# Altium PCB IO_Board.PcbDoc
Units mil, origin at the board's own origin, x right, y up, seen from the top; angles counter-clockwise.
Board outline 2204.72 x 1604.33 mil, 2 copper layers (Top Layer, Bottom Layer); 63 components, 43 nets, 210 pads, 287 vias.
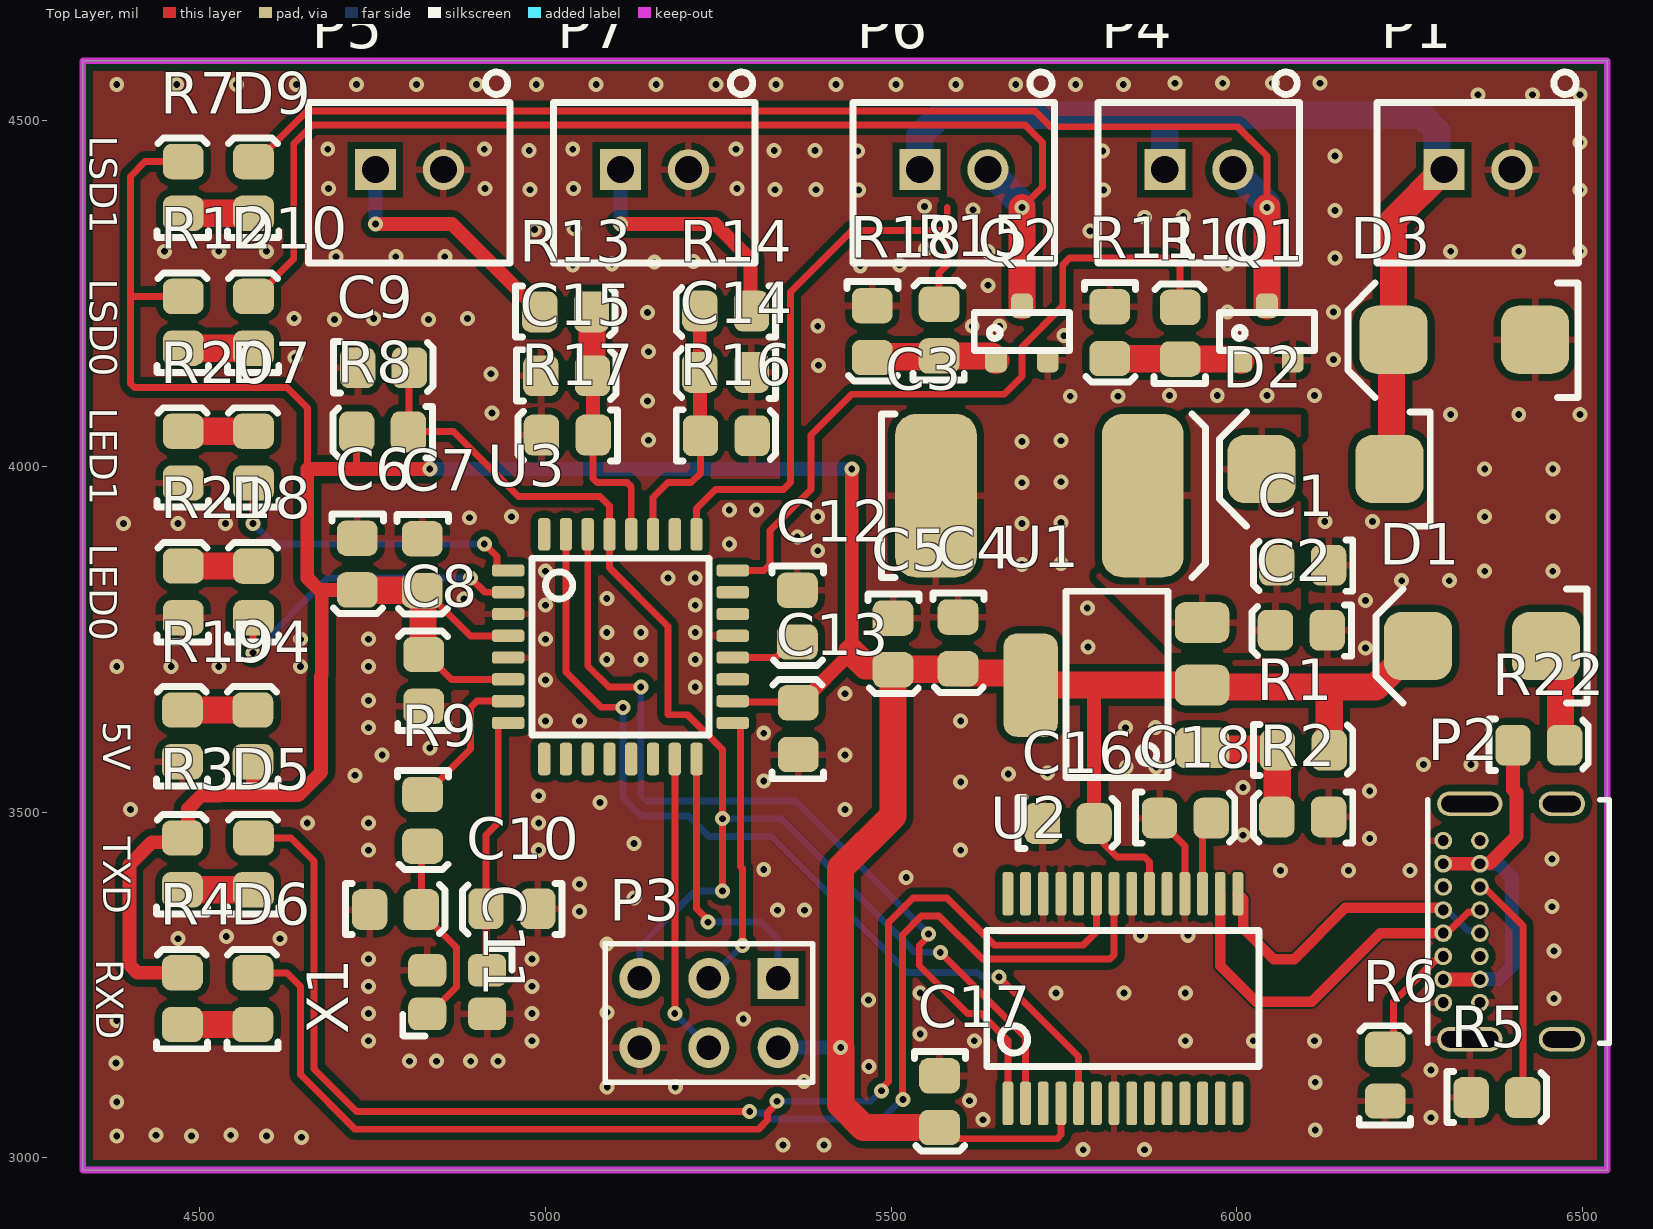
[diagram p0: Top Layer view]
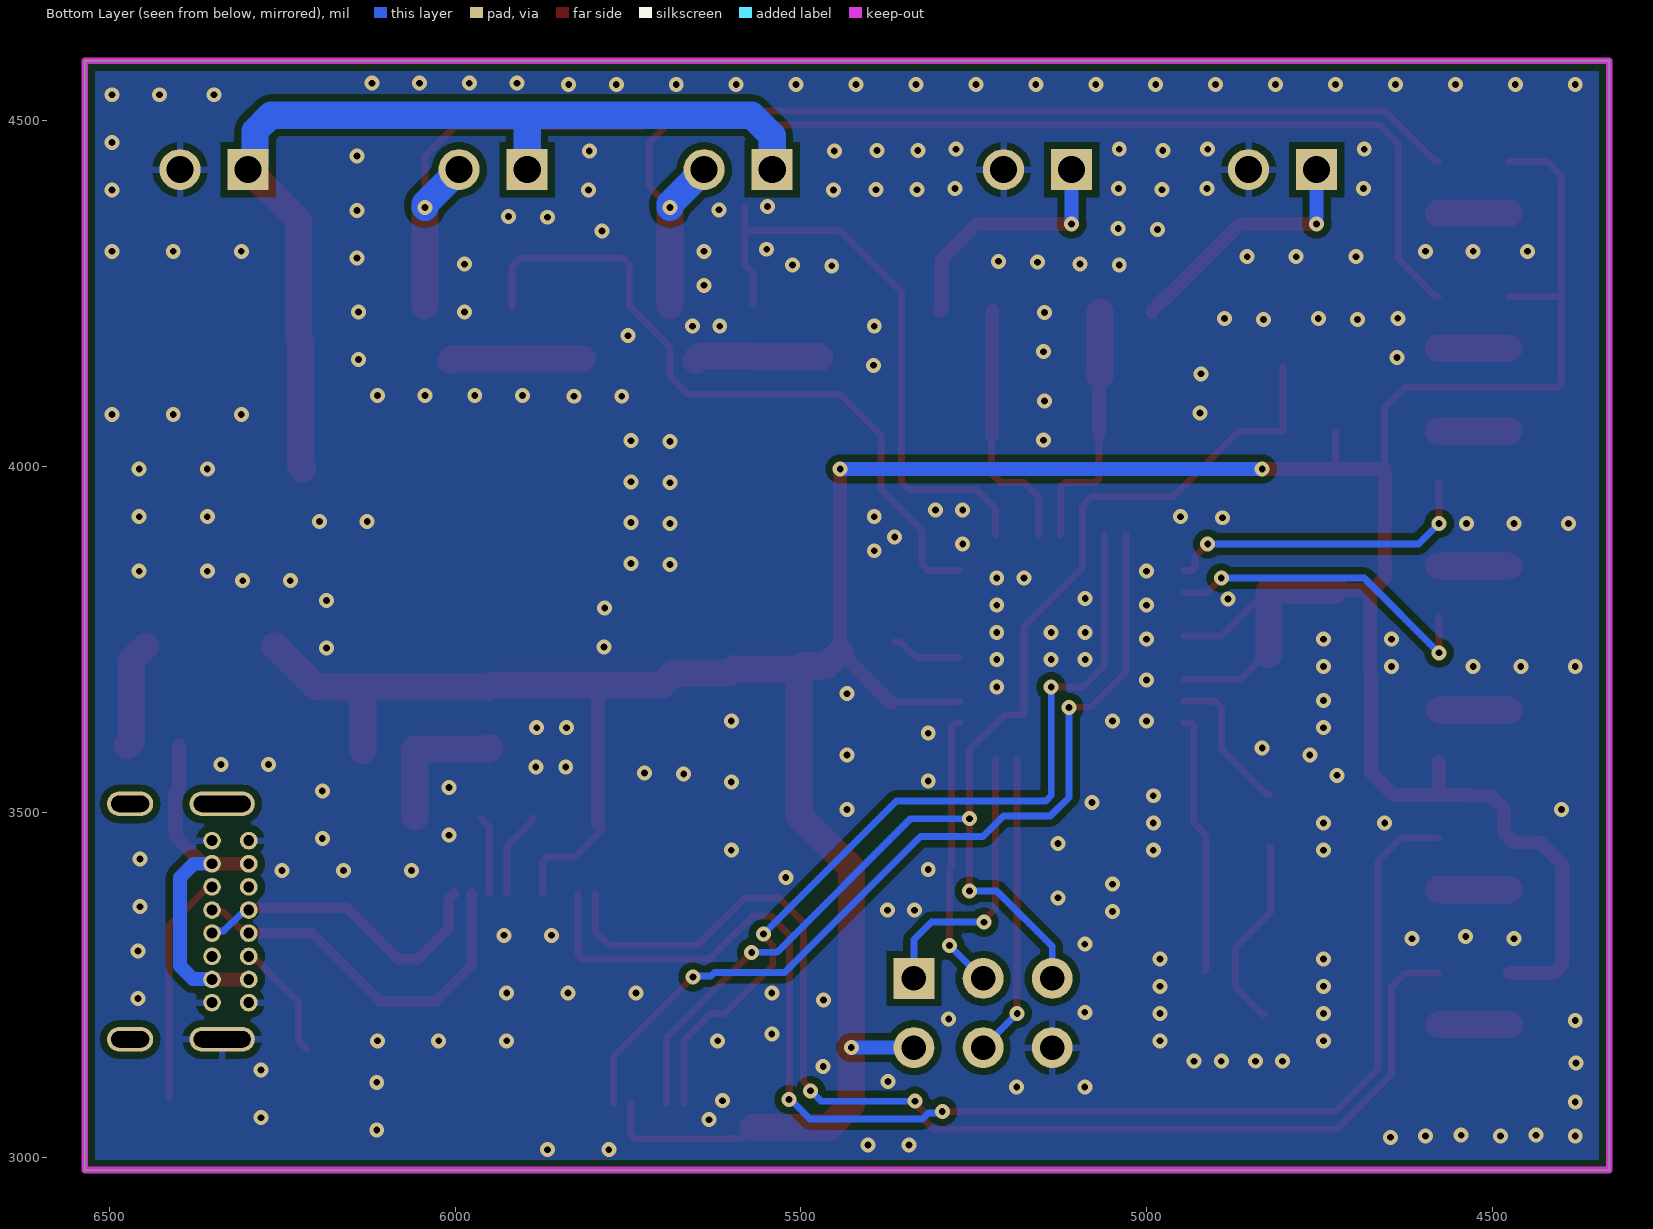
[diagram p1: Bottom Layer view, seen from below]

## Layer stack, top to bottom
Top Solder: solder mask 0.4, Solder Resist, Dk 3.5
Top Layer: signal copper 1.4
Dielectric 1: dielectric 12.6, FR-4, Dk 4.8
Bottom Layer: signal copper 1.4
Bottom Solder: solder mask 0.4, Solder Resist, Dk 3.5

## Board outline
4330.71,2982.28 4330.71,4586.61 6535.43,4586.61 6535.43,2982.28

## Design rules (kind name [scope] priority, off if disabled: settings)
Clearance Clearance_1 [InNet('GND') vs InDifferentialPairClass('USB_DIFF_CLASS')] p1: gap=2.4 ignorepadtopadclearanceinfootprint=TRUE
Clearance [All] p2: gap=10 ignorepadtopadclearanceinfootprint=TRUE except(0: Arc-Hole Track-Hole SMDPad-Hole THPad-Hole Via-Hole Fill-Hole Poly-Hole Region-Hole Text-Hole)
DiffPairsRouting DiffPairsUSB [InDifferentialPairClass('USB_DIFF_CLASS')] p1: maxlimit=52 minlimit=20 mostfreqgap=46.65 toplayer_minwidth=10 toplayer_maxwidth=100 toplayer_prefwidth=53.78 bottomlayer_minwidth=10 bottomlayer_maxwidth=100 bottomlayer_prefwidth=53.78 maxuncoupledlength=500
DiffPairsRouting [All] p2: maxlimit=10 minlimit=10 mostfreqgap=10 toplayer_minwidth=15 toplayer_maxwidth=15 toplayer_prefwidth=15 bottomlayer_minwidth=15 bottomlayer_maxwidth=15 bottomlayer_prefwidth=15 maxuncoupledlength=500
PolygonConnect [All] p1: thpad.connectstyle=Relief thpad.reliefconductorwidth=10 thpad.reliefentries=4 thpad.polygonreliefangle="90 Angle" thpad.airgapwidth=10 smdpad.connectstyle=Relief smdpad.reliefconductorwidth=10 smdpad.reliefentries=4 smdpad.polygonreliefangle="90 Angle" smdpad.airgapwidth=10 via.connectstyle=Direct via.reliefconductorwidth=10 via.reliefentries=4 via.polygonreliefangle="90 Angle" via.airgapwidth=10
RoutingVias [All] p1: holewidth=9.84 width=21.65 viastyle="Through Hole" minholewidth=9.84 minwidth=21.65 maxholewidth=9.84 maxwidth=21.65
SolderMaskExpansion [All] p1: expansion=4 istentingtop=FALSE
Width [All] p1: maxlimit=196.85 minlimit=2 preferedwidth=10 minimp=50.000000 maximp=50.000000 favimp=50.000000
29 further rules are at their usual default settings.

## Classes and differential pairs
differential pair class USB_DIFF_CLASS: USB
differential pair USB: +USB_P -USB_N

## Components (designator, comment, footprint, x,y, rotation, side; value= is the part's Value field where it differs from the comment)
C1 "470nF" 0805 6094.55,3855.97 r180 top
C2 "100nF" 0805 6092.52,3761.99 r180 top
C3 "68uF" 2924 5712.27,3957.55 r0 top
C4 "1uF" 0805 5597.64,3744.15 r270 top
C5 "100nF" 0805 5503.65,3742.66 r270 top
C6 "1uF" 0805 4728.85,3858.27 r270 top
C7 "100nF" 0805 4822.83,3857.3 r270 top
C8 "100nF" 0805 4822.83,3690.94 r90 top
C9 "10nF" 0805 4766.22,4143.7 r0 top
C10 "12pF" 0805 4950.79,3359.26 r180 top
C11 "12pF" 0805 4783.46,3360.09 r0 top
C12 "100nF" 0805 5365.2,3782.95 r270 top
C13 "100nF" 0805 5364.38,3621.08 r90 top
C14 "10nF" 0805 5260.04,4134.79 r180 top
C15 "10nF" 0805 5031.03,4132.1 r0 top
C16 "100nF" 0805 5756.38,3484.58 r0 top
C17 "100nF" 0805 5570.87,3080.71 r270 top
C18 "100nF" 0805 5925.88,3492.33 r0 top
D1 "SD560BTR" "SMB Diode" 6437.01,3740.16 r180 top
D2 "SD560BTR" "SMB Diode" 6210.63,3996.06 r180 top
D3 "SM6T39CAY" "ST SMB Diode" 6328.74,4183.07 r0 top
D4 "Red" "0805 LED" 4575.74,3610.71 r90 top
D5 "Orange" "0805 LED" 4576.77,3425.59 r90 top
D6 "Orange" "0805 LED" 4575.74,3230.62 r90 top
D7 "Blue" "0805 LED" 4576.77,4013.85 r90 top
D8 "Blue" "0805 LED" 4576.78,3818.88 r90 top
D9 "Yellow" "0805 LED" 4576.77,4403.77 r90 top
D10 "Yellow" "0805 LED" 4576.78,4208.81 r90 top
P1 "B2B-XH-A(LF)(SN)" "XH 2 PIN VERT" 6348.43,4424.13 r0 top
P2 "USB4085-GF-A" USB4085-GF-A 6456.69,3336.61 r90 top
P3 "2.54mm" "TH 2.54mm Header 2x3" 5336.22,3259.45 r180 top
P4 "B2B-XH-A(LF)(SN)" "XH 2 PIN VERT" 5944.88,4424.13 r0 top
P5 "B2B-XH-A(LF)(SN)" "XH 2 PIN VERT" 4803.15,4424.13 r0 top
P6 "B2B-XH-A(LF)(SN)" "XH 2 PIN VERT" 5590.55,4424.13 r0 top
P7 "B2B-XH-A(LF)(SN)" "XH 2 PIN VERT" 5157.48,4424.13 r0 top
Q1 "BC817-16LT1" "ON SOT-23 BJT" 6043.31,4192.91 r0 top
Q2 "BC817-16LT1" "ON SOT-23 BJT" 5688.98,4192.91 r0 top
R1 "240R" 0805 6096.46,3590.37 r0 top
R2 "680R" 0805 6094.55,3491.95 r180 top
R3 "2k" 0805 4473.91,3425.59 r90 top
R4 "2k" 0805 4473.91,3230.63 r90 top
R5 "5.1k" 0805 6376.46,3088.26 r0 top
R6 "5.1k" 0805 6213.34,3120.08 r90 top
R7 "2k" 0805 4474.94,4403.78 r90 top
R8 "1k" 0805 4763.78,4048.89 r180 top
R9 "0R" 0805 4823.28,3487.6 r270 top
R10 "1k" 0805 5916.82,4192.95 r90 top
R11 "20k" 0805 5816.93,4192.91 r270 top
R12 "2k" 0805 4474.94,4208.82 r90 top
R13 "51k" 0805 5029.53,4224.3 r0 top
R14 "51k" 0805 5260.04,4223.47 r180 top
R15 "1k" 0805 5568.19,4197.6 r90 top
R16 "51k" 0805 5261.95,4045.28 r0 top
R17 "51k" 0805 5031.03,4044.24 r180 top
R18 "20k" 0805 5473.47,4194.41 r270 top
R19 "2k" 0805 4473.91,3610.71 r90 top
R20 "1k" 0805 4474.94,4013.86 r90 top
R21 "1k" 0805 4474.94,3818.9 r90 top
R22 "0R" 0805 6437.01,3597.77 r0 top
U1 "TI LM317DCYR" "TI SOT-223" 5949.5,3593.05 r90 top
U2 "FT232RL" "FTDI 28-SSOP" 5834.97,3230.31 r0 top
U3 "ATMEGA 328P-AU" "ATMEL TQFP-32" 5108.27,3739.19 r0 top
X1 "16MHz" "Abracon 4-SMD 3.2x2.5" 4872.26,3239.69 r180 top

## Footprints (in the part's own frame and the unit in brackets; to place one, negate y for a bottom-side part, rotate by r counter-clockwise, add the part's x,y. Pads: shape width x height; smd on the part's side, far side on the other; paste and mask are expansions set on the pad)
0805 [mil]
  rrect50% 51.18x59.06 smd: 1(-37.87,-1.03) 2(36.93,-1.03)
  silkscreen extent -73,-37 71,37, body extent -39,-26 39,26, height 29
"0805 LED" [mil]
  rrect50% 51.18x59.06 smd: A(-37.87,-1.03) K(36.93,-1.03)
  silkscreen extent -73,-37 71,37, body extent -43,-25 35,25, height 39
2924 [mm]
  rrect50% 3x6 smd: 1(-3.75,0) 2(3.85,0)
  silkscreen extent -5.75,-3 6.15,3, body extent -3.94,-2.81 4.04,2.81, height 1.14
"Abracon 4-SMD 3.2x2.5" [mm]
  rrect50% 1.4x1.2 smd: 1(-1.1,-0.8) 2(1.1,0.8) GND(-1.1,0.8) GND(1.1,-0.8)
  silkscreen extent -2.02,-1.6 2,1.61, body extent -1.6,-1.25 1.6,1.25, height 0.8
"ATMEL TQFP-32" [mm]
  rrect50% 1.2x0.45 smd: 1(-4.125,2.8) 2(-4.125,2) 3(-4.125,1.2) 4(-4.125,0.4) 5(-4.125,-0.4) 6(-4.125,-1.2) 7(-4.125,-2) 8(-4.125,-2.8) 17(4.125,-2.8) 18(4.125,-2) 19(4.125,-1.2) 20(4.125,-0.4) 21(4.125,0.4) 22(4.125,1.2) 23(4.125,2) 24(4.125,2.8)
  rrect50% 0.45x1.2 smd: 9(-2.8,-4.125) 10(-2,-4.125) 11(-1.2,-4.125) 12(-0.4,-4.125) 13(0.4,-4.125) 14(1.2,-4.125) 15(2,-4.125) 16(2.8,-4.125) 25(2.8,4.125) 26(2,4.125) 27(1.2,4.125) 28(0.4,4.125) 29(-0.4,4.125) 30(-1.2,4.125) 31(-2,4.125) 32(-2.8,4.125)
  silkscreen extent -3.25,-3.25 3.25,3.25, body extent -4.5,-4.5 4.5,4.5, height 1.1
"FTDI 28-SSOP" [mm]
  rrect50% 0.4x1.6 smd paste+0 mask+0.051: 1(-4.225,-3.85) 2(-3.575,-3.85) 3(-2.925,-3.85) 4(-2.275,-3.85) 5(-1.625,-3.85) 6(-0.975,-3.85) 7(-0.325,-3.85) 8(0.325,-3.85) 9(0.975,-3.85) 10(1.625,-3.85) 11(2.275,-3.85) 12(2.925,-3.85) 13(3.575,-3.85) 14(4.225,-3.85) 15(4.225,3.85) 16(3.575,3.85) 17(2.925,3.85) 18(2.275,3.85) 19(1.625,3.85) 20(0.975,3.85) 21(0.325,3.85) 22(-0.325,3.85) 23(-0.975,3.85) 24(-1.625,3.85) 25(-2.275,3.85) 26(-2.925,3.85) 27(-3.575,3.85) 28(-4.225,3.85)
  silkscreen extent -5,-2.5 5,2.5, body extent -5.1,-3.9 5.1,3.9, height 2
"ON SOT-23 BJT" [mm] "NUP2105L"
  rrect50% 0.8x0.9 smd: B(-0.95,-1) C(0,1) E(0.95,-1)
  silkscreen extent -1.75,-0.65 1.75,0.75, body extent -1.5,-1.27 1.5,1.28, height 1
"SMB Diode" [mm]
  rrect50% 2.5x2.5 smd: A(-0.25,0) K(4.45,0)
  silkscreen extent -1.75,-2.1 6,2.1, body extent -0.69,-1.97 4.9,1.97, height 2.5
"ST SMB Diode" [mm]
  rrect50% 2.5x2.5 smd: A(2.6,0) K(-2.6,0)
  silkscreen extent -4.28,-2.12 4.17,2.08, body extent -2.88,-1.99 2.71,1.95, height 2.5
"TH 2.54mm Header 2x3" [mm]
  rect 1.5x1.5 hole 0.9: 1(0,0)
  round 1.5 hole 0.9: 2(0,2.54) 3(2.54,0) 4(2.54,2.54) 5(5.08,0) 6(5.08,2.54)
  silkscreen extent -1.27,-1.27 6.35,3.81, body extent -1.27,-1.27 6.35,3.81, height 9.5
"TI SOT-223" [mm]
  rrect50% 1.5x2 smd: 1(0,0) 2(2.3,0) 3(4.6,0)
  rrect50% 3.8x2 smd: 2(2.3,6.3)
  silkscreen extent -1.1,1.25 5.75,5, body extent -0.92,-0.44 5.58,6.64, height 1.6
USB4085-GF-A [mm]
  round 0.65 hole 0.4: A1(-2.848,4.025) A4(-1.998,4.025) A5(-1.148,4.025) A6(-0.298,4.025) A7(0.552,4.025) A8(1.402,4.025) A9(2.252,4.025) A12(3.102,4.025) B1(3.102,2.675) B4(2.252,2.675) B5(1.402,2.675) B6(0.552,2.675) B7(-0.298,2.675) B8(-1.148,2.675) B9(-1.998,2.675) B12(-2.848,2.675)
  oval 0.9x2.4 hole 0.6 slot 2.1 at 90 deg: P1(-4.198,3.045) P2(4.452,3.045)
  oval 0.9x1.7 hole 0.6 slot 1.4 at 90 deg: P3(4.452,-0.335) P4(-4.198,-0.335)
  silkscreen extent -4.35,-2.07 4.6,4.58, body extent -4.39,-4.56 4.64,4.61, height 3.46
"XH 2 PIN VERT" [mm]
  round 1.508 hole 1: 1(1.25,0.127)
  rect 1.508x1.508 hole 1: 2(-1.25,0.127)
  silkscreen extent -3.7,-3.3 3.7,3.71, body extent -3.61,-3.24 3.61,2.6, height 7.21

## Part data
C1: library part GCM21BR71H474KA37L, Digikey Part Number="DO NOT USE FOR NEW DESIGNS", Manufacturer=muRata, Rated Voltage=50V, Tolerance=10%, Material=X7R, Part Number=GCM21BR71H474KA37L
C2 C5 C7 C8 C12 C13 C16 C17 C18: library part GCM21BR71E104KA37L, Digikey Part Number="DO NOT USE FOR NEW DESIGNS", Manufacturer=muRata, Rated Voltage=25V, Tolerance=10%, Material=X7R, Part Number=GCM21BR71E104KA37L
C3: library part TAJV686K035RNJ, Digikey Part Number=478-13135-1-ND, Manufacturer="AVX Corporation", Rated Voltage=35V, Tolerance=10%, Material=Tantalum, Part Number=TAJV686K035RNJ
C4 C6: library part AC0805KKX7R8BB105, Digikey Part Number="DO NOT USE FOR NEW DESIGNS", Manufacturer=YAGEO, Rated Voltage=25V, Tolerance=10%, Material=X7R, Part Number=AC0805KKX7R8BB105
C9: library part GCM2195C1H103JA16D, Digikey Part Number=490-4783-1-ND, Manufacturer=muRata, Rated Voltage=50V, Tolerance=±5%, Material="C0G, NP0", Part Number=GCM2195C1H103JA16D
C10 C11: library part GCM21B5c1H120JA37L, Digikey Part Number="DO NOT USE FOR NEW DESIGNS", Manufacturer=muRata, Rated Voltage=50V, Tolerance=5%, Material=C0G, Part Number=GCM21B5c1H120JA37L
C14 C15: library part GCM21BR71H103KA37L, Digikey Part Number="DO NOT USE FOR NEW DESIGNS", Manufacturer=muRata, Rated Voltage=50V, Tolerance=10%, Material=X7R, Part Number=GCM21BR71H103KA37L
D1 D2: "1.2V_F 600V 5A SMB", Digikey Part Number=1655-1530-2-ND, Manufacturer="SMC Diode Solutions", Digikey Link=https://www.digikey.com/product-detail/en/smc-diode-solutions/SD560BTR/1655-1530-2-ND/6022620, Part Number=SD560BTR
D3: "42.8V Clamp 93A (8/20µs) Ipp Tvs Diode Surface Mount SMB (DO-214AA)", Manufacturer=ST, Alternative Parts=https://www.digikey.com/en/products/detail/stmicroelectronics/SM6T39AY/2442901, Digikey Link=https://www.digikey.com/en/products/detail/stmicroelectronics/SM6T39CAY/2442903, Digikey Part Number=SM6T39CAY, Part Number=SM6T39CAY, Vbr=42.8V, Vf=42.8
D4: library part SML-210LTT86, "Red LED Indication - Discrete 1.75V 0805 (2012 Metric)", Digikey Part Number=511-1286-1-ND, Manufacturer="ROHM Semiconductor", Colour=Red, Digikey Link=https://www.digikey.com/product-detail/en/rohm-semiconductor/SML-210LTT86/511-1286-1-ND/637099, Part Number=SML-210LTT86
D5 D6: library part SML-211DTT86, "Orange LED Indication - Discrete 1.75V 0805 (2012 Metric)", Digikey Part Number=511-1291-1-ND, Manufacturer="ROHM Semiconductor", Colour=Orange, Digikey Link=https://www.digikey.com/product-detail/en/rohm-semiconductor/SML-211DTT86/511-1291-1-ND/637104, Part Number=SML-211DTT86
D7 D8: library part SML-MN2BCTT86C, "LED BLUE CLEAR 2012 SMD", Digikey Part Number=846-1207-1-ND, Manufacturer="ROHM Semiconductor", Colour=Blue, Digikey Link=https://www.digikey.com/product-detail/en/rohm-semiconductor/SMLMN2BCTT86C/846-1207-1-ND/6057239, Part Number=SML-MN2BCTT86C
D9 D10: library part SML-211YTT86, "Yellow LED Indication - Discrete 1.75V 0805 (2012 Metric)", Digikey Part Number=511-1293-1-ND, Manufacturer="ROHM Semiconductor", Colour=Yellow, Digikey Link=https://www.digikey.com/product-detail/en/rohm-semiconductor/SML-211YTT86/511-1293-1-ND/637106, Part Number=SML-211YTT86
P1 P4 P5 P6 P7: Digikey Part Number=455-2247-ND, Angle=0, Contact=Tin, Digikey Link=https://www.digikey.com.au/en/products/detail/jst-sales-america-inc/B2B-XH-A-LF-SN/1651045, Flange=No, Part Number=B2B-XH-A(LF)(SN), Pitch=2.54mm, Positions=2, Row Spacing=2.54mm
P2: "USB - C (Type - C) USB 2.0 Receptacle Connector 16 Position Through Hole, Right Angle", Digikey Part Number=2073-USB4085-GF-ACT-ND, Angle=90, Digikey Link=https://www.digikey.ee/product-detail/en/gct/USB4085-GF-A/2073-USB4085-GF-ACT-ND/9859733, Part Number=USB4085-GF-A
P3: library part "TH 2.54mm Header 2x3", Angle=0, Contact=NA, Flange=No, Part Number="TH 2.54mm Header 2x3", Pitch=2.54mm, Positions=6, Row Spacing=2.54mm
Q1 Q2: "300mW  BJT NPN Transistor", Digikey Part Number=BC817-16LT1OSTR-ND, Manufacturer="ON Semiconductor", Digikey Link=https://www.digikey.com.au/product-detail/en/on-semiconductor/BC817-16LT1/BC817-16LT1OSTR-ND/606178, Part Number=BC817-16LT1
R1: library part RC0805FR07240RL, Digikey Part Number=311-240CRCT-ND, Manufacturer=YAGEO, Rated Voltage=0.125W, Tolerance=0.01, Material=FR-07, Part Number=RC0805FR07240RL
R2: library part RC0805FR07680RL, Digikey Part Number=311-680CRCT-ND, Manufacturer=YAGEO, Rated Voltage=0.125W, Tolerance=0.01, Material=FR-07, Part Number=RC0805FR07680RL
R3 R4 R7 R12 R19: library part RC0805FR072KL, Digikey Part Number=311-2.00KCRCT-ND, Manufacturer=YAGEO, Rated Voltage=0.125W, Tolerance=0.01, Material=FR-07, Part Number=RC0805FR072KL
R5 R6: library part RC0805FR075K1L, Digikey Part Number=311-5.10KCRCT-ND, Manufacturer=YAGEO, Rated Voltage=0.125W, Tolerance=0.01, Material=FR-07, Part Number=RC0805FR075K1L
R8 R10 R15 R20 R21: library part RC0805FR071KL, Digikey Part Number=311-1.00KCRCT-ND, Manufacturer=YAGEO, Rated Voltage=0.125W, Tolerance=0.01, Material=FR-07, Part Number=RC0805FR071KL
R9 R22: library part RC0805FR070RL, Digikey Part Number=311-0.0CRCT-ND, Manufacturer=YAGEO, Rated Voltage=0.125W, Tolerance=0.01, Material=FR-07, Part Number=RC0805FR070RL
R11 R18: library part RC0805FR0720KL, Digikey Part Number=311-20.0KCRCT-ND, Manufacturer=YAGEO, Rated Voltage=0.125W, Tolerance=0.01, Material=FR-07, Part Number=RC0805FR0720KL
R13 R14 R16 R17: library part RC0805FR0751KL, Digikey Part Number=311-51.0KCRCT-ND, Manufacturer=YAGEO, Rated Voltage=0.125W, Tolerance=0.01, Material=FR-07, Part Number=RC0805FR0751KL
U1: "Linear Voltage Regulator IC 1 Output 1.5A SOT-223-4", Digikey Part Number=296-12602-1-ND, Input Voltage=3V-40V, Manufacturer="Texas Instruments", Output Power=1.5A, Output Voltage=1.25V-37V, Digikey Link=https://www.digikey.com/product-detail/en/texas-instruments/LM317DCYR/296-12602-1-ND/443738, Isolation=Non-Isolated, Part Number="TI LM317DCYR"
U2: "USB Bridge, USB to UART USB 2.0 UART Interface 28-SSOP", Digikey Part Number=768-1007-1-ND, Manufacturer=FTDI, Digikey Link=https://www.digikey.com/product-detail/en/ftdi-future-technology-devices-international-ltd/FT232RL-REEL/768-1007-1-ND/1836402, Part Number=FT232RL
U3: "AVR AVR® ATmega Microcontroller IC 8-Bit 20MHz 32KB (16K x 16) FLASH 32-TQFP (7x7)", Digikey Part Number=ATMEGA328P-AU-ND, Manufacturer=ATMEL, Digikey Link=https://www.digikey.com/product-detail/en/microchip-technology/ATMEGA328P-AU/ATMEGA328P-AU-ND/1832260, Part Number="ATMEGA 328P-AU"
X1: library part ABM8AIG-16.000MHZ-12-2Z-T3, Digikey Part Number=535-13386-1-ND, Load Capacitance=12pF, Manufacturer="Abracon LLC", Digikey Link=https://www.digikey.com/en/products/detail/abracon-llc/ABM8AIG-16-000MHZ-12-2Z-T3/5817586, ESR=70R, Part Number=ABM8AIG-16.000MHZ-12-2Z-T3

## Via types
v1: diameter 21.65, hole 9.84, Top Layer to Bottom Layer, 287 vias

## Nets (pads, with @x,y where several pads share a name; then routed paths per layer and width w, separated by ;. In a path a pad name is that pad's centre, name@x,y a point inside that pad or via, vN(x,y) a via of type N, cw(c..) or ccw(c..) an arc to the next point about the centre after c; other vN are vias at no path point)
3.3V: C18.2 U2.17 | length 114.7
  Top Layer w10: U2.17 5950.13,3478.62 C18.2
5V: C4.2 C5.2 C6.2 C7.2 C8.2 C13.2 C16.2 C17.2 D1.K D4.A P3.2 R1.2 R3.2 R4.2 R7.2 R8.2 R12.2 U1.2 U2.4 U2.20 U3.4 U3.6 U3.18 | length 6184.6
  Top Layer w10: R12.2 4399.61,4245.75 ; R7.2 4421.02,4440.71 4399.61,4419.29 4399.61,4245.75 ; 4655.51,3996.06 4655.51,4084.65 4625.98,4114.17 4405.46,4114.17 4399.61,4120.03 4399.61,4245.75 ; 4724.41,3996.06 4726.85,3998.51 R8.2 ; C7.2 4825.74,3820.38 4891.18,3754.94 U3.4 ; C8.2 4827.81,3727.87 4863.73,3691.95 U3.6 ; U3.18 5271.89,3659.23 5368.13,3659.23 C13.2@5369.35,3658.01 ; C17.2 5585.61,3028 5599.78,3028 5600.22,3027.56 5739.55,3027.56 5745.4,3033.42 U2.4 ; C16.2@5785.78,3476.03 5826.77,3435.04 5866.14,3435.04 5873.36,3427.82 U2.20
  Top Layer w20: R4.2 4409.92,3267.56 4398.2,3279.27 4398.2,3423.79 4430.91,3456.5 4468.92,3456.5 4482.76,3470.34 4482.76,3504.75 4501.64,3523.62 4527.56,3523.62 ; 4528.19,3524.25 4576.77,3524.25 ; D4.A 4576.77,3524.25 ; 4672.75,3821.34 4655.51,3838.58 4655.51,3996.06 4724.41,3996.06 v1(4832.68,3996.06) ; C6.2 4676.5,3821.34 4676.5,3697.86 4675.2,3696.56 4675.2,3557.53 4641.92,3524.25 4576.77,3524.25 ; C13.2@5369.35,3658.01 5442.91,3731.58 v1(5442.91,3996.06) ; 5787.4,3683.6 5793.3,3677.7 C16.2
  Top Layer w39.37: C6.2 4728.3,3820.86 4821.32,3820.86 C7.2 4822.83,3819.35 4822.83,3728.9 C8.2 ; 5442.91,3731.58 5462.86,3711.63 5496.72,3711.63 C5.2 ; C17.2 5460.16,3043.78 5426.85,3077.09 v1(5426.85,3159.45) 5426.51,3159.79 5426.51,3418.64 5502.62,3494.75 C5.2 ; R1.2 6133.38,3672.75 6141.73,3681.1 ; D1.K 6259.84,3740.16 6200.79,3681.1 6141.73,3681.1 ; C5.2 5503.37,3706.48 5595.86,3706.48 C4.2 5602.51,3701.32 5683.75,3701.32 5701.47,3683.6 5787.4,3683.6 5949.5,3683.6 5952,3681.1 6141.73,3681.1
  Bottom Layer w20: v1(4832.68,3996.06) v1(5442.91,3996.06) ; P3.2 v1(5426.85,3159.45)
CONTROL0: R15.2 U3.25 | length 875.3
  Top Layer w10: U3.25 5218.5,3938.98 5246.06,3966.54 5344.49,3966.54 5354.33,3976.38 5354.33,4251.97 5443.54,4341.18 5575.07,4341.18 5580.93,4335.32 ; R15.2 5569.22,4279.63 5580.93,4291.34 5580.93,4374.69
CONTROL1: R10.2 U3.24 | length 1033.3
  Top Layer w10: U3.24 5315.97,3849.43 5324.8,3858.27 5324.8,3907.48 5383.86,3966.54 5383.86,4045.28 5442.91,4104.33 5663.43,4104.33 5688.98,4129.87 5688.98,4172.7 5748.03,4231.76 5748.03,4291.34 5757.87,4301.18 5905.51,4301.18 5917.85,4288.84 R10.2
GND: C1.1 C2.1 C3.1 C4.1 C5.1 C6.1 C7.1 C8.1 C9.1 C10.1 C11.1 C12.1 C13.1 C14.1 C15.1 C16.1 C17.1 C18.1 D3.A P1.1 P2.A1 P2.A12 P2.B1 P2.B12 P2.P1 P3.6 P5.1 P7.1 Q1.E Q2.E R2.1 R5.1 R6.1 R11.1 R16.2 R17.2 R18.1 R19.1 R20.1 R21.1 U2.7 U2.18 U2.21 U2.25 U2.26 U3.3 U3.5 U3.21 X1.GND | length 124.5
  Top Layer w10: C18.1 5888,3487.36 5924.54,3450.83 U2.18
  other v1: 5777.56,3011.81 5866.14,3011.81 5343.5,3018.7 5402.56,3018.7 4647.17,3029.7 4379.92,3031.5 4488.19,3031.5 4596.46,3031.5 4436.56,3032.77 4544.83,3032.77 6113.19,3040.35 5632.87,3055.12 6280.51,3058.07 4379.92,3080.71 5613.19,3082.68 5089.23,3102.23 5187.66,3102.23 6113.19,3109.25 5374.02,3110.24 6280.51,3126.97 5467.52,3131.89 4378.65,3137.35 4803.15,3139.76 4842.52,3139.76 4891.73,3139.76 4931.1,3139.76 4744.09,3169.29 4980.31,3169.29 5620.08,3169.29 5925.2,3169.29 6023.62,3169.29 6112.2,3169.29 5541.89,3179.13 4379.92,3198.82 5286.08,3200.65 4744.09,3208.66 4980.31,3208.66 5089.23,3210.5 5467.02,3228.35 6458.66,3230.31 5541.89,3238.19 5738.19,3238.19 5836.61,3238.19 5925.2,3238.19 4744.09,3248.03 4980.31,3248.03 4744.09,3287.4 4980.31,3287.4 6458.66,3299.21 5089.23,3308.92 4468.5,3316.93 4616.14,3316.93 4538.41,3320.24 5860.24,3321.85 5929.13,3321.85 5049.21,3356.3 5335.3,3358.13 5374.67,3358.13 6455.71,3363.19 5127.95,3375.98 5049.21,3395.67 5521.65,3405.51 6062.99,3415.35 6161.42,3415.35 6250,3415.35 5315.61,3417.19 6455.71,3432.09 4744.09,3444.88 4990.16,3444.88 5600.39,3444.88 5127.95,3454.72 6191.93,3461.61 6008.86,3466.54 4655.51,3484.25 4744.09,3484.25 4990.16,3484.25 4399.61,3503.94 5433.07,3503.94 5078.74,3513.78 4990.16,3523.62 6191.93,3530.51 6008.86,3535.43 5600.39,3543.31 5315.61,3545.14 4724.41,3553.15 5669.29,3555.12 5725.93,3556.39 5839.85,3565.41 5883.16,3565.41 6269.69,3568.9 6338.58,3568.9 4763.78,3582.68 5433.07,3582.68 4832.68,3592.52 5315.61,3614.04 4744.09,3622.05 5838.58,3622.05 5881.89,3622.05 5000,3631.89 5049.21,3631.89 5600.39,3631.89 4744.09,3661.42 5433.07,3671.26 5216.54,3681.1 5000,3690.94 4379.92,3710.63 4458.66,3710.63 4527.56,3710.63 4645.67,3710.63 4744.09,3710.63 5088.58,3720.47 5137.8,3720.47 5216.54,3720.47 6186.02,3737.2 5784.73,3738.64 4645.67,3750 4744.09,3750 5000,3750 5088.58,3759.84 5137.8,3759.84 5216.54,3759.84 5783.46,3795.28 5000,3799.21 5216.54,3799.21 6186.02,3806.1 4881.89,3808.09 5088.58,3809.06 6238.19,3834.65 6307.09,3834.65 5177.17,3838.58 5216.54,3838.58 5000,3848.43 6358.27,3848.43 6456.69,3848.43 5688.98,3858.27 5745.62,3859.54 5393.7,3877.95 5265.75,3887.8 5364.17,3897.64 4389.76,3917.32 4468.5,3917.32 4537.4,3917.32 5688.98,3917.32 5745.62,3918.59 6126.97,3920.28 6195.87,3920.28 4890.14,3925.66 4950.79,3927.17 5393.7,3927.17 6358.27,3927.17 6456.69,3927.17 5265.75,3937.01 5305.12,3937.01 5688.98,3976.38 5745.62,3977.65 6358.27,3996.06 6456.69,3996.06 5688.98,4035.8 5745.62,4037.07 5148.91,4037.85 6309.06,4074.8 6407.48,4074.8 6496.06,4074.8 4922.53,4077.22 5147.64,4094.49 5758.86,4101.38 5827.76,4101.38 5902.56,4102.36 5971.46,4102.36 6043.31,4102.36 6112.2,4102.36 4921.26,4133.86 5394.97,4146.12 6139.76,4154.53 4637.8,4157.48 5148.91,4165.8 5750,4188.98 5393.7,4202.76 5617.13,4202.76 5656.5,4202.76 4694.88,4212.6 4830.71,4212.6 4636.53,4214.12 4751.52,4213.87 4887.35,4213.87 5147.64,4222.44 5986.22,4223.43 6139.76,4223.43 5639.76,4261.81 5455.17,4290.07 5039.37,4291.34 5511.81,4291.34 5986.22,4292.32 5096.01,4292.61 5157.48,4295.28 5214.12,4296.55 6141.73,4301.18 4696.85,4303.15 4783.46,4303.15 4854.33,4303.15 4448.82,4311.02 4527.56,4311.02 4596.46,4311.02 5639.76,4311.02 6309.06,4311.02 6407.48,4311.02 6496.06,4311.02 5549.21,4313.98 5787.4,4340.55 4984.25,4342.52 5040.89,4343.79 5866.14,4360.24 5922.78,4361.51 6141.73,4370.08 5618.11,4371.06 5548.23,4375.98 4977.65,4400.05 5331.98,4400.05 5391.03,4400.05 5452.76,4399.61 5807.09,4399.61 6496.06,4399.61 4686.31,4402.02 4912.69,4402.02 5040.64,4402.02 5276.86,4402.02 6141.73,4448.82 5451.49,4456.25 5805.82,4456.25 4976.38,4456.69 5330.71,4456.69 5389.76,4456.69 4685.04,4458.66 4911.42,4458.66 5039.37,4458.66 5275.59,4458.66 6496.06,4468.5 6348.43,4537.4 6427.17,4537.4 6496.06,4537.4 4379.92,4552.17 4466.6,4552.17 4553.27,4552.17 4639.95,4552.17 4726.62,4552.17 4813.3,4552.17 4899.97,4552.17 4986.65,4552.17 5073.33,4552.17 5160,4552.17 5246.68,4552.17 5333.35,4552.17 5420.03,4552.17 5506.7,4552.17 5593.38,4552.17 5680.06,4552.17 5766.73,4552.17 5835.63,4552.17 5910.43,4554.13 5979.33,4554.13 6051.18,4554.13 6120.08,4554.13
IN0: P7.2 R14.1 | length 368.7
  Top Layer w20: P7.2@5104.66,4425.53 P7.2 ; v1(5108.27,4350.39) 5245.51,4350.39 5296.59,4299.31 5296.59,4225.82 R14.1
  Bottom Layer w20: v1(5108.27,4350.39) P7.2
IN1: P5.2 R13.1 | length 370.5
  Top Layer w20: v1(4753.94,4350.39) 4864.53,4350.39 4973.85,4241.07 4976.28,4241.07 4991.66,4225.7 R13.1
  Bottom Layer w20: v1(4753.94,4350.39) P5.2
INPUT0: C14.2 R14.2 R16.1 U3.27 | length 371.3
  Top Layer w10: U3.27 5155.51,3954.72 5177.17,3976.38 5210.68,3976.38 5224.07,3989.77 R16.1 R16.1@5223.59,4044.73
  Top Layer w20: R14.2 C14.2 5223.59,4135.34 R16.1@5223.59,4044.73
INPUT1: C15.2 R13.2 R17.1 U3.28 | length 369.6
  Top Layer w10: R17.1 5068.9,3982.24 5074.76,3976.38 5118.16,3976.38 5124.02,3970.52 U3.28
  Top Layer w20: R17.1@5068.43,4045.75 C15.2@5068.43,4130.6
  Top Layer w39.37: R13.2 5067.2,4222.52 5067.2,4131.82 C15.2
LED0: D7.A U3.1 | length 465.8
  Top Layer w10: v1(4576.77,3917.32) 4576.77,3974.94 D7.A ; v1(4911.42,3887.8) 4929.68,3869.53 4929.68,3853.29 4933.54,3849.43 U3.1
  Bottom Layer w10: v1(4576.77,3917.32) 4606.3,3887.8 v1(4911.42,3887.8)
LED1: D8.A U3.2 | length 473.6
  Top Layer w10: v1(4576.77,3730.32) 4576.77,3779.97 D8.A ; v1(4891.73,3838.58) 4912.38,3817.93 U3.2
  Bottom Layer w10: v1(4576.77,3730.32) 4685.04,3838.58 v1(4891.73,3838.58)
LSD0: D10.K P6.1 Q2.C | length 1680.4
  Top Layer w10: D10.K 4581.75,4245.74 4635.83,4299.81 4635.83,4466.5 4663.11,4493.78 5693.23,4493.78 5718.5,4468.5 5718.5,4404.04 v1(5688.98,4374.51)
  Top Layer w39.37: P6.1@5639.76,4423.72 P6.1 ; Q2.C v1(5688.98,4374.51)
  Bottom Layer w39.37: P6.1 5688.98,4379.92 v1(5688.98,4374.51)
LSD1: D9.K P4.1 Q1.C | length 1819.6
  Top Layer w10: D9.K 4581.74,4440.7 4654.82,4513.78 5707.68,4513.78 5730.31,4491.14 6000.98,4491.14 6043.31,4448.82 v1(6043.31,4374.51)
  Top Layer w39.37: P4.1@5994.09,4423.72 P4.1 ; Q1.C v1(6043.31,4374.51)
  Bottom Layer w39.37: P4.1 6043.31,4379.92 v1(6043.31,4374.51)
MISO: P3.1 U3.16 | length 410.7
  Top Layer w10: U3.16 5218.5,3360.49 5235.08,3343.91 v1(5235.08,3340.76)
  Bottom Layer w10: v1(5235.08,3340.76) 5311.22,3340.76 5336.22,3315.76 P3.1
MOSI: P3.4 U3.15 | length 437.7
  Top Layer w10: v1(5187.01,3208.66) U3.15
  Bottom Layer w10: v1(5187.01,3208.66) P3.4
NetC11_2: C11.2 R9.2 X1.2 | length 284.4
  Top Layer w10: R9.2 4820.39,3448.82 C11.2 4820.39,3355.12 4871.51,3304 4871.51,3246.81 4832.89,3208.19 X1.2
NetC12_2: C12.2 U3.20 | length 102.9
  Top Layer w10: U3.20 5333.44,3723.45 5356.01,3746.02 C12.2
NetD1_A: D1.A R22.2 | length 154.6
  Top Layer w39.37: D1.A 6468.03,3718.98 6468.03,3602.64 R22.2
NetD4_K: D4.K R19.2 | length 101.8
  Top Layer w39.37: R19.2 D4.K
NetD5_A: D5.A R3.1 | length 102.9
  Top Layer w39.37: R3.1 D5.A
NetD5_K: D5.K U2.22 | length 1968.2
  Top Layer w10: D5.K 4632.02,3462.51 4665.35,3429.18 4665.35,3128.68 4726.87,3067.17 v1(5295.28,3067.17) ; v1(5517.1,3084.29) 5516.06,3085.33 5516.06,3322.42 5543.36,3349.72 5569.31,3349.72 5631.63,3287.4 5657.58,3287.4 5816.32,3287.4 5822.18,3293.26 U2.22
  Bottom Layer w10: v1(5295.28,3067.17) 5297.51,3064.94 5315.06,3064.94 5323.95,3056.04 5486.52,3056.04 5514.76,3084.29 v1(5517.1,3084.29)
NetD6_A: D6.A R4.1 | length 101.8
  Top Layer w39.37: R4.1 D6.A
NetD6_K: D6.K U2.23 | length 1763.4
  Top Layer w10: D6.K 4625.83,3267.55 4645.35,3248.03 4645.35,3120.39 4724.41,3041.34 5307.86,3041.34 5321.1,3054.58 5321.1,3065.17 5334.65,3078.72 v1(5334.65,3081.87) ; v1(5485.74,3096.93) 5485.74,3100.09 5496.06,3110.41 5496.06,3340.55 5531.5,3375.98 5580.71,3375.98 5649.29,3307.4 5777.56,3307.4 5796.58,3326.43 U2.23
  Bottom Layer w10: v1(5334.65,3081.87) 5470.68,3081.87 v1(5485.74,3096.93)
NetD7_K: D7.K R20.2 | length 101.8
  Top Layer w39.37: R20.2 D7.K
NetD8_K: D8.K R21.2 | length 101.8
  Top Layer w39.37: R21.2 D8.K
NetD9_A: D9.A R7.1 | length 101.8
  Top Layer w39.37: R7.1 D9.A
NetD10_A: D10.A R12.1 | length 101.8
  Top Layer w39.37: R12.1 D10.A
NetP2_A5: P2.A5 R6.2 | length 172.6
  Top Layer w10: R6.2 6226.1,3168.74 6226.1,3225.13 6286.72,3285.75 6288.35,3285.75 6294.01,3291.41 P2.A5
NetP2_B5: P2.B5 R5.2 | length 333.7
  Top Layer w10: P2.B5 6354.36,3388.83 6360.19,3388.83 6413.38,3335.64 R5.2
NetQ1_B: Q1.B R10.1 R11.2 | length 191
  Top Layer w39.37: R11.2 5816.35,4155.53 5917.4,4155.53 R10.1 6004.37,4155.08 Q1.B
NetQ2_B: Q2.B R15.1 R18.2 | length 182.6
  Top Layer w39.37: R18.2 5473.56,4158.6 5568.1,4158.6 R15.1 5645.39,4159.73 Q2.B
NetR1_1: R1.1 R2.2 U1.1 | length 207.4
  Top Layer w39.37: U1.1 5951.35,3591.2 6056.73,3591.2 R1.1 6058.1,3588.86 6058.1,3493.46 R2.2
RST: C9.2 P3.5 R8.1 U2.2 U3.29 | length 1932.1
  Top Layer w10: C9.2 4802.4,4141.92 4802.4,4050.67 4866.65,4050.67 4960.94,3956.38 5079.06,3956.38 5092.52,3942.91 U3.29 5092.52,3853.37 5177.17,3768.72 5177.17,3640.77 5205.63,3640.77 5255.91,3590.49 v1(5255.91,3385.83) ; v1(5570.97,3297.14) 5694.22,3173.89 U2.2
  Bottom Layer w10: P3.5 5136.22,3305.51 5216.54,3385.83 v1(5255.91,3385.83) ; v1(5255.91,3490.39) 5341.19,3490.39 5534.34,3297.24 5570.87,3297.24 v1(5570.97,3297.14)
RXD: U2.5 U3.31 | length 1314.5
  Top Layer w10: U3.31 5029.53,3702.67 5080.62,3651.57 5111.55,3651.57 v1(5112.05,3651.07) ; v1(5655.75,3261.57) 5770.99,3146.33 U2.5
  Bottom Layer w10: v1(5112.05,3651.07) 5112.05,3521.2 5139.15,3494.09 5206.69,3494.09 5236.22,3464.57 5326.72,3464.57 5523.57,3267.72 5624.92,3267.72 5629.92,3262.72 5654.61,3262.72 v1(5655.75,3261.57)
SCK: P3.3 U3.17 | length 400
  Top Layer w10: U3.17 5277.87,3628.96 5281.73,3625.1 5281.73,3421.5 5284.65,3418.58 v1(5284.65,3307.09)
  Bottom Layer w10: P3.3 5237.01,3259.45 v1(5284.65,3307.09)
TXD: U2.1 U3.30 | length 1251.2
  Top Layer w9.84: U3.30 5061.02,3711.62 5091.54,3681.1 v1(5137.8,3681.1) ; v1(5554.06,3323.89) 5554.06,3320.7 5540.49,3307.13 5540.49,3278.4 5610.24,3208.66 5629.92,3208.66 5668.63,3169.95 U2.1
  Bottom Layer w9.84: v1(5137.8,3681.1) 5137.8,3523.62 5145.28,3516.14 5361.81,3516.14 v1(5554.06,3323.89)
USB_N: P2.A7 P2.B7 U2.15 | length 458.7
  Top Layer w15: U2.15 6008.81,3374.39 6008.81,3331.74 6053.15,3287.4 6082.68,3287.4 6156.79,3361.52 P2.A7@6298.23,3361.52
  Bottom Layer w10: P2.A7 6302.45,3358.34 6308.12,3352.68 6309.75,3352.68 6334.56,3327.87 6348.39,3327.87 P2.B7
USB_P: P2.A6 P2.B6 U2.16 | length 556.3
  Top Layer w10: P2.A6 6302.45,3324.88 6308.12,3330.55 6309.75,3330.55 6334.56,3355.36 6348.39,3355.36 P2.B6
  Top Layer w15: U2.16 5975.72,3277.64 6009.55,3243.81 6027.61,3225.75 6108.21,3225.75 6126.27,3243.81 6207.35,3324.88 P2.A6
VIN: D2.A D3.K P1.2 P4.2 P6.2 | length 1423.2
  Top Layer w39.37: D2.A 6223.43,3999.02 6223.43,4180.12 D3.K 6226.38,4356.3 P1.2
  Bottom Layer w39.37: P6.2 5541.34,4478.35 5570.87,4507.87 5895.67,4507.87 ; P4.2 5895.67,4507.87 ; P1.2 6289.21,4439.13 6289.21,4484.97 6266.31,4507.87 5895.67,4507.87
VIN_D: C1.2 C2.2 C3.2 D2.K U1.3
VUSB: P2.A4 P2.A9 P2.B4 P2.B9 R22.1 | length 532.1
  Top Layer w20: P2.A4 P2.B9 ; P2.A9 P2.B4 ; 6364.96,3425.95 6404.06,3465.05 6404.06,3527.52 6399.14,3532.44 R22.1
  Bottom Layer w20: P2.B9 6352.04,3258.62 6378.7,3258.62 6397.64,3277.56 6397.64,3405.51 6377.95,3425.2 6351.45,3425.2 P2.B4
XTAL_IN: C10.2 U3.8 X1.1 | length 377.8
  Top Layer w10: X1.1 4913.86,3272.89 C10.2 4913.86,3467.01 4931.67,3484.82 4931.67,3625.1 4935.53,3628.96 U3.8
XTAL_OUT: R9.1 U3.7 | length 215
  Top Layer w10: R9.1 4826.18,3525.47 4891.73,3591.02 4891.73,3651.57 4900.61,3660.45 U3.7
pads on no net: P2.A8 P2.B8 P2.P2 P2.P3 P2.P4 U2.3 U2.6 U2.8 U2.9 U2.10 U2.11 U2.12 U2.13 U2.14 U2.19 U2.24 U2.27 U2.28 U3.9 U3.10 U3.11 U3.12 U3.13 U3.14 U3.19 U3.22 U3.23 U3.26 U3.32

## Polygon pours and split planes (outlines as drawn)
GND on Top Layer "GND_L01_P002" (solid, remove dead copper, pour order 2): 4330.71,4586.61 6535.43,4586.61 6535.43,2982.28 4330.71,2982.28
VIN_D on Top Layer "VIN_D_L01_P000" (solid, pour order 0): 6092.52,4074.8 5797.24,4074.8 5797.24,3838.58 5905.51,3730.32 6092.52,3730.32
GND on Bottom Layer "GND_L02_P001" (solid, pour order 1): 4330.71,4586.61 6535.43,4586.61 6535.43,2982.28 4330.71,2982.28

## Keep-outs
Keep-Out Layer:
  lines w10: 4330.71,2982.28 6535.43,2982.28 6535.43,4586.61 4606.3,4586.61 4330.71,4586.61 4330.71,2982.28

## Silkscreen, mask and mechanical layers (free items; w line width, h text height)
Top Overlay:
  text "LSD1" at 4340.55,4478.35 h39.37 r270
  text "LSD0" at 4340.55,4271.65 h39.37 r270
  text "LED1" at 4340.55,4084.65 h39.37 r270
  text "LED0" at 4340.55,3887.8 h39.37 r270
  text "5V" at 4360.39,3631.73 h39.37 r270
  text "TXD" at 4360.39,3464.41 h39.37 r270
  text "RXD" at 4350.39,3287.4 h39.37 r270

## Dimensions
4330.71,4586.61 to 4330.71,2982.28 on Drill Drawing
6535.43,2982.28 to 4330.71,2982.28 on Drill Drawing